# Altium PCB VECTOR_unrouted.PcbDoc
Units mm, origin at the board's own origin, x right, y up, seen from the top; angles counter-clockwise.
Board outline 152.4 x 101.6 mm, 4 copper layers (Top Layer, VCC, Ground, Bottom Layer), stack 0.778 mm thick; 115 components, 252 nets, 1062 pads, 0 vias.
Unrouted connection lines stored in the file: 73.
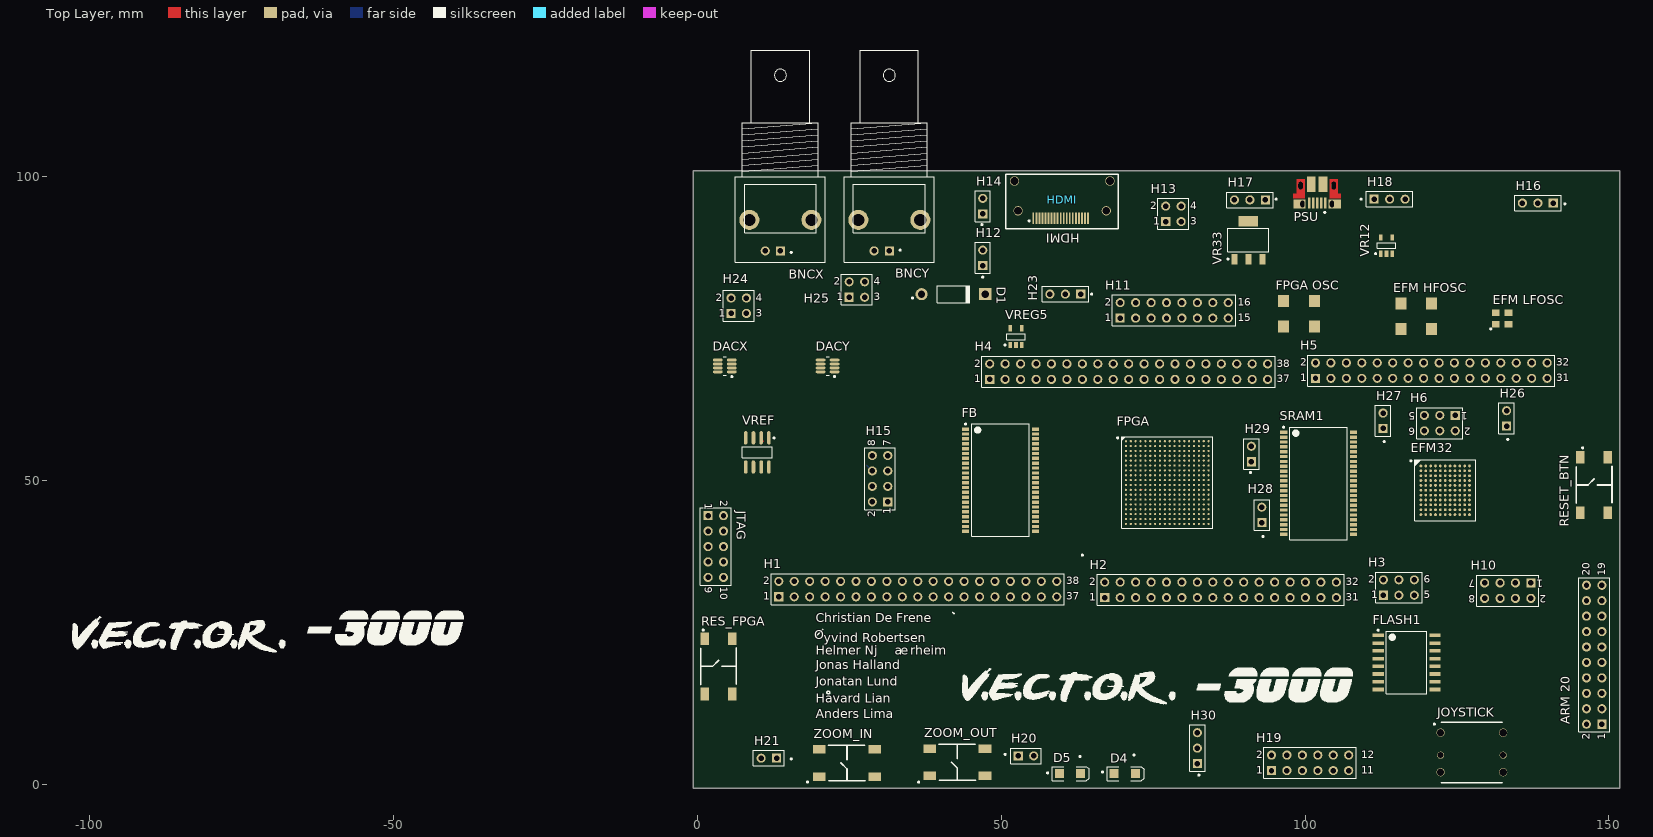
[diagram p0: Top Layer view]
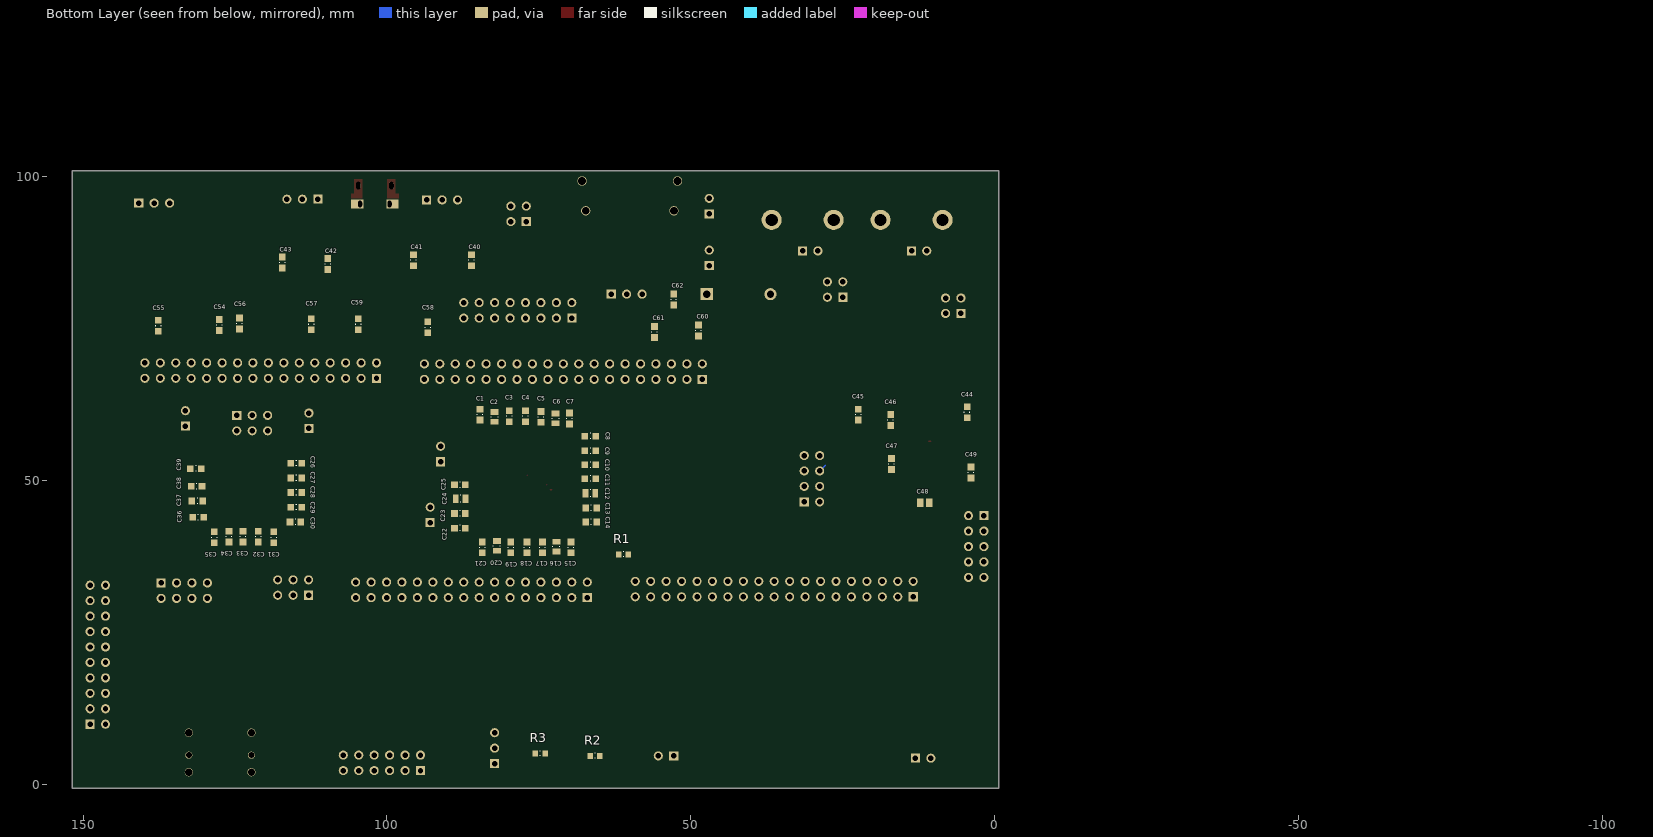
[diagram p1: Bottom Layer view, seen from below]
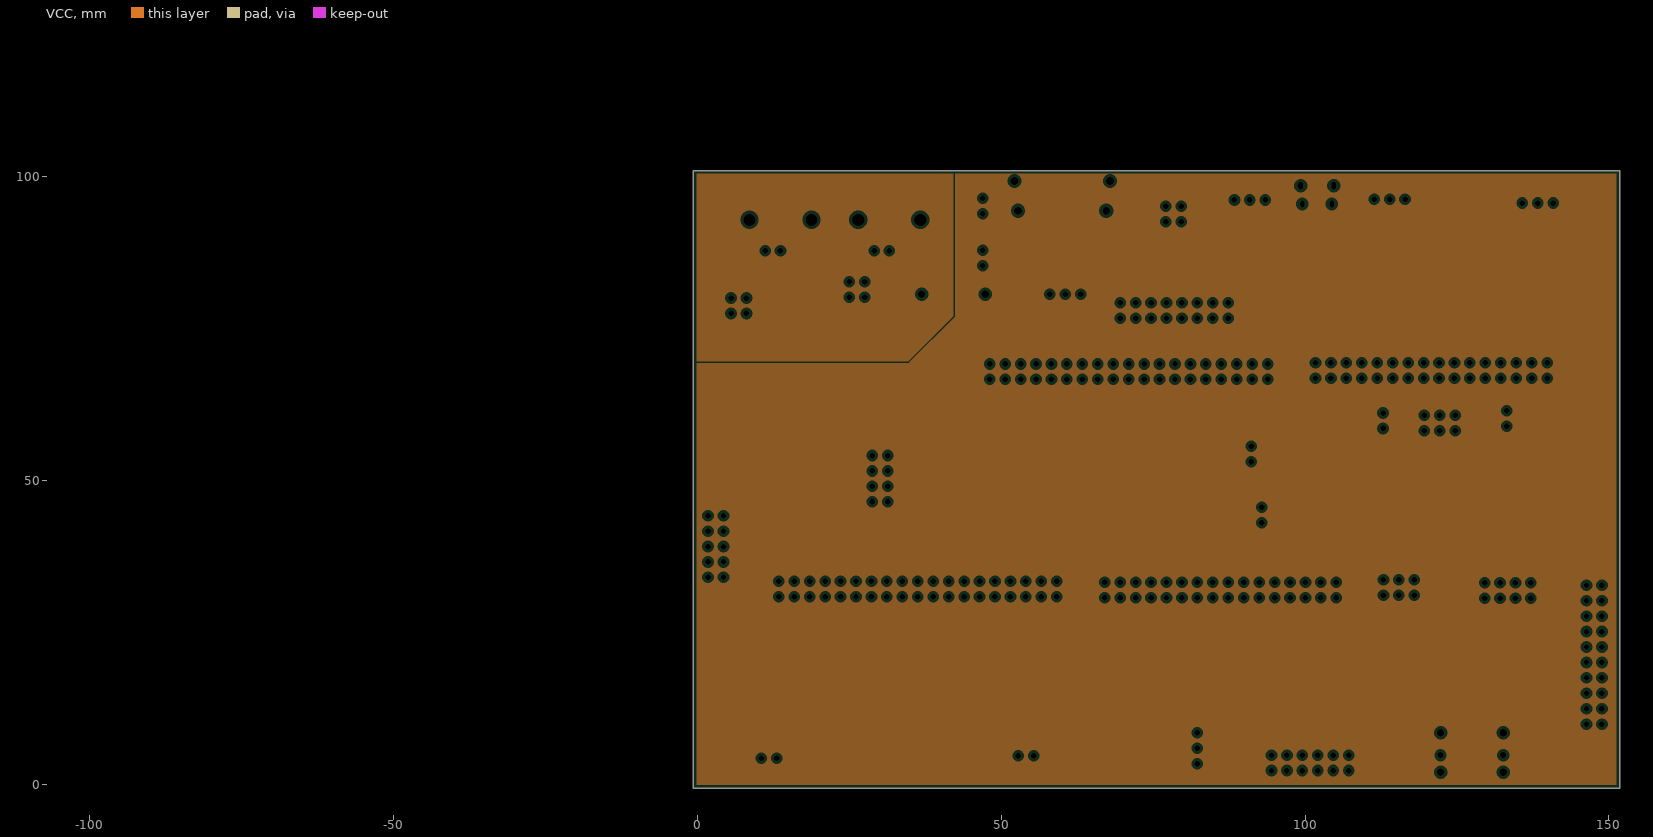
[diagram p2: VCC, clearances drawn from the general rule]
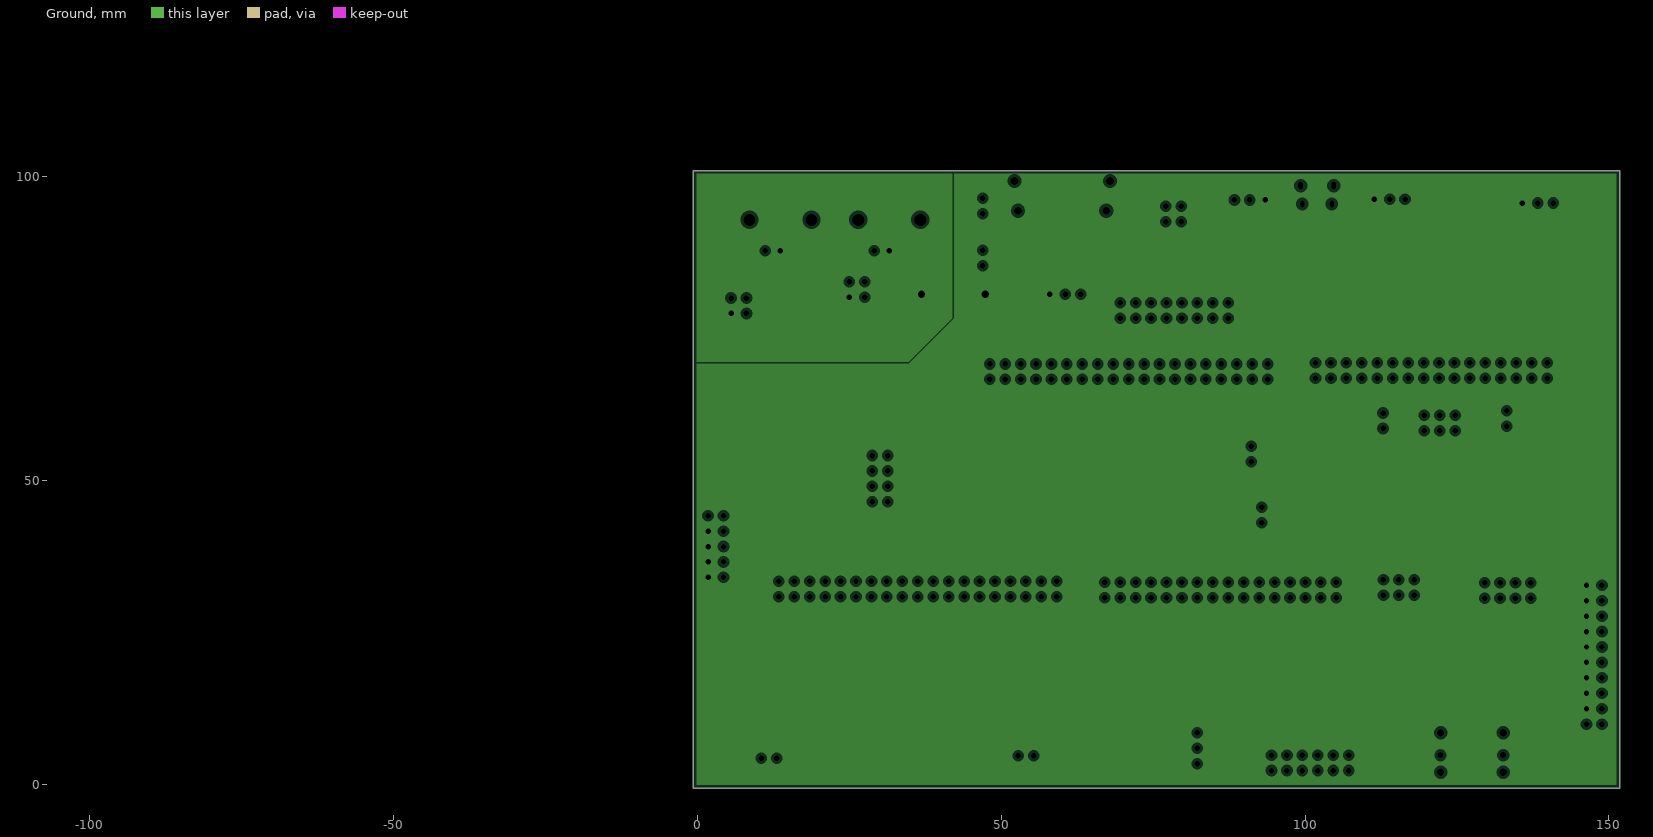
[diagram p3: Ground, clearances drawn from the general rule]

## Layer stack, top to bottom
Top Solder: solder mask 0.0102, Solder Resist, Dk 3.5
Top Layer: signal copper 0.0356
Dielectric 1: core 0.254, FR-4, Dk 4.2
VCC: plane copper 0.036
Dielectric 3: prepreg 0.127, Dk 4.2
Ground: plane copper 0.036, net (Multiple Nets)
Dielectric 2: core 0.254, Dk 4.2
Bottom Layer: signal copper 0.0356
Bottom Solder: solder mask 0.0102, Solder Resist, Dk 3.5

## Board outline
-0.635,-0.635 151.765,-0.635 151.765,100.965 75.692,100.965 -0.635,100.965

## Design rules (kind name [scope] priority, off if disabled: settings)
Clearance Clearance_HDMI [InNetClass('HDMI') vs InNetClass('HDMI')] p1: gap=0.2
Clearance [InNetClass('Non_HDMI') vs InNetClass('Non_HDMI')] p2: gap=0.254
MinimumSolderMaskSliver [All] p1: minsoldermaskwidth=0.1
PlaneClearance [All] p1: clearance=0.508
PlaneConnect [All] p1: planeconnectstyle=Relief reliefexpansion=0.508 reliefentries=4 reliefconductorwidth=0.254 reliefairgap=0.254
PolygonConnect [All] p1: connectstyle=Relief reliefconductorwidth=0.254 reliefentries=4 polygonreliefangle="90 Angle" airgapwidth=0.254
RoutingVias [All] p1: holewidth=0.711 width=1.27 viastyle="Through Hole" minholewidth=0.711 minwidth=1.27 maxholewidth=0.711 maxwidth=1.27
SolderMaskExpansion [All] p1: expansion=0.127
Width Width_Power [InNetClass('Power')] p1: maxlimit=0.508 minlimit=0.508 preferedwidth=0.508
Width Width_Signal [InNetClass('Signal')] p2: maxlimit=0.254 minlimit=0.254 preferedwidth=0.254
Width [All] p3: maxlimit=0.254 minlimit=0.254 preferedwidth=0.254
27 further rules are at their usual default settings.

## Classes and differential pairs
component class SRAM: H4 H5 H6 SRAM1
component class "Power Supply": C40 C41 C42 C43 C60 C61 C62 D4 D5 H16 H17 H18 H23 R2 R3 VR12 VR33 VREG5
component class JoystickButtons: H19 H20 H21 JOYSTICK ZOOM_IN ZOOM_OUT
component class HDMI: H11 H12 H13 H14 HDMI
component class "Frame Buffer": FB H1 H2 H3
component class "FPGA Config": JTAG R1
component class "FPGA Bank 0": FPGA RES_FPGA
component class FPGA_VCC: C1 C2 C3 C4 C5 C6 C7 C8 C9 C10 C11 C12 C13 C14 C15 C16 C17 C18 C19 C20 C21 C22 C23 C24 C25
component class Flash: FLASH1 H10
component class EFM: "ARM 20" C39 EFM32 H29 RESET_BTN
component class "EFM Power": C26 C27 C28 C29 C30 C31 C32 C33 C34 C35 C36 C37 C38
component class DAC: BNCX BNCY C44 C45 C46 C47 C48 C49 D1 DACX DACY H15 H24 H25 H30 VREF
component class Clocks: C54 C55 C56 C57 C58 C59 "EFM HFOSC" "EFM LFOSC" "FPGA OSC" H26 H27 H28
net class EBI.A[0..22]: EBI.A0 EBI.A1 EBI.A2 EBI.A3 EBI.A4 EBI.A5 EBI.A6 EBI.A7 EBI.A8 EBI.A9 EBI.A10 EBI.A11 EBI.A12 EBI.A13 EBI.A14 EBI.A15 EBI.A16 EBI.A17 EBI.A18 EBI.A19 EBI.A20 EBI.A21 EBI.A22
net class EBI.D[0..15]: EBI.D0 EBI.D1 EBI.D2 EBI.D3 EBI.D4 EBI.D5 EBI.D6 EBI.D7 EBI.D8 EBI.D9 EBI.D10 EBI.D11 EBI.D12 EBI.D13 EBI.D14 EBI.D15
net class FB.A[0..18]: FB.A0 FB.A1 FB.A2 FB.A3 FB.A4 FB.A5 FB.A6 FB.A7 FB.A8 FB.A9 FB.A10 FB.A11 FB.A12 FB.A13 FB.A14 FB.A15 FB.A16 FB.A17 FB.A18
net class FB.D[0..15]: FB.D0 FB.D1 FB.D2 FB.D3 FB.D4 FB.D5 FB.D6 FB.D7 FB.D8 FB.D9 FB.D10 FB.D11 FB.D12 FB.D13 FB.D14 FB.D15

## Components (designator, comment, footprint, x,y, rotation, side; value= is the part's Value field where it differs from the comment)
"ARM 20" "ARM 20 Pin Header" HDR2X10 148.844,9.906 r90 top
BNCX "BNC" "BNC_RA CON" 13.716,87.757 r270 top
BNCY "BNC" "BNC_RA CON" 31.623,87.757 r270 top
C1 "4.7uF" CAPC0603(1608)100_M 84.709,60.833 r270 bottom
C2 "100uF" CAPC0805(2012)75_L 82.296,60.452 r270 bottom
C3 "470nF" CAPC0603(1608)100_M 79.883,60.579 r270 bottom
C4 "470nF" CAPC0603(1608)100_M 77.216,60.579 r270 bottom
C5 "4.7uF" CAPC0603(1608)100_M 74.676,60.452 r270 bottom
C6 "100uF" CAPC0805(2012)75_L 72.263,60.198 r90 bottom
C7 "470nF" CAPC0603(1608)100_M 69.977,60.198 r270 bottom
C8 "470nF" CAPC0603(1608)100_M 66.548,57.277 r180 bottom
C9 "470nF" CAPC0603(1608)100_M 66.548,54.864 r180 bottom
C10 "470nF" CAPC0603(1608)100_M 66.548,52.578 r0 bottom
C11 "470nF" CAPC0603(1608)100_M 66.548,50.292 r0 bottom
C12 "100uF" CAPC0805(2012)75_L 66.548,47.879 r0 bottom
C13 "4.7uF" CAPC0603(1608)100_M 66.421,45.466 r0 bottom
C14 "470nF" CAPC0603(1608)100_M 66.421,43.18 r0 bottom
C15 "470nF" CAPC0603(1608)100_M 69.723,38.989 r90 bottom
C16 "100uF" CAPC0805(2012)75_L 72.136,39.116 r90 bottom
C17 "4.7uF" CAPC0603(1608)100_M 74.422,38.989 r90 bottom
C18 "470nF" CAPC0603(1608)100_M 76.962,38.989 r90 bottom
C19 "470nF" CAPC0603(1608)100_M 79.629,38.989 r90 bottom
C20 "100uF" CAPC0805(2012)75_L 81.915,39.243 r90 bottom
C21 "4.7uF" CAPC0603(1608)100_M 84.328,38.989 r90 bottom
C22 "470nF" CAPC0603(1608)100_M 88.011,42.164 r180 bottom
C23 "470nF" CAPC0603(1608)100_M 88.011,44.577 r180 bottom
C24 "100uF" CAPC0805(2012)75_L 87.884,46.99 r180 bottom
C25 "4.7uF" CAPC0603(1608)100_M 88.011,49.276 r180 bottom
C26 "100nF" CAPC0603(1608)100_M 114.935,52.832 r180 bottom
C27 "100nF" CAPC0603(1608)100_M 114.935,50.419 r180 bottom
C28 "100nF" CAPC0603(1608)100_M 114.935,48.006 r180 bottom
C29 "100nF" CAPC0603(1608)100_M 114.935,45.593 r180 bottom
C30 "100nF" CAPC0603(1608)100_M 115.062,43.18 r180 bottom
C31 "100nF" CAPC0603(1608)100_M 118.618,40.64 r270 bottom
C32 "100nF" CAPC0603(1608)100_M 121.158,40.767 r90 bottom
C33 "10uF" CAPC0603(1608)100_M 123.698,40.767 r90 bottom
C34 "100nF" CAPC0603(1608)100_M 125.984,40.767 r90 bottom
C35 "100nF" CAPC0603(1608)100_M 128.397,40.64 r90 bottom
C36 "100nF" CAPC0603(1608)100_M 131.064,43.942 r180 bottom
C37 "1uF" CAPC0603(1608)100_M 131.191,46.609 r180 bottom
C38 "4.7uF" CAPC0603(1608)100_M 131.318,49.022 r180 bottom
C39 "1uF" CAPC0603(1608)100_M 131.445,51.943 r180 bottom
C40 "1uF" CAPC0603(1608)100_M 86.106,86.233 r90 bottom
C41 "1uF" CAPC0603(1608)100_M 95.631,86.233 r90 bottom
C42 "1uF" CAPC0603(1608)100_M 109.728,85.598 r90 bottom
C43 "1uF" CAPC0603(1608)100_M 117.221,85.852 r90 bottom
C44 "1uF" CAPC0603(1608)100_M 4.572,61.214 r90 bottom
C45 "1uF" CAPC0603(1608)100_M 22.479,60.833 r90 bottom
C46 "10uF" CAPC0603(1608)100_M 17.145,59.944 r90 bottom
C47 "100nF" CAPC0603(1608)100_M 17.018,52.705 r90 bottom
C48 "1uF" C0805 11.557,46.355 r0 bottom
C49 "100nF" CAPC0603(1608)100_M 3.937,51.308 r90 bottom
C54 "10nF" CAPC0603(1608)100_M 127.57,75.569 r270 bottom
C55 "15pF" CAPC0603(1608)100_M 137.603,75.442 r270 bottom
C56 "10nF" CAPC0603(1608)100_M 124.268,75.823 r90 bottom
C57 "15pF" CAPC0603(1608)100_M 112.457,75.696 r90 bottom
C58 "10nF" CAPC0603(1608)100_M 93.28,75.188 r90 bottom
C59 "15pF" CAPC0603(1608)100_M 104.71,75.696 r270 bottom
C60 "1uF" CAPC0603(1608)100_M 48.768,74.676 r90 bottom
C61 "4.7uF" CAPC0603(1608)100_M 56.007,74.422 r90 bottom
C62 "4.7uF" CAPC0603(1608)100_M 52.832,79.756 r90 bottom
D1 "Diode 1N4001" DO-41 42.164,80.645 r0 top
D4 "LED2" 3.2X1.6X1.1 70.355,1.77 r0 top
D5 "LED2" 3.2X1.6X1.1 61.345,1.79 r0 top
DACX "AD5061BRJZ-1500RL7" RJ-8_N 4.572,68.834 r180 top
DACY "AD5061BRJZ-1500RL7" RJ-8_N 21.463,68.834 r180 top
EFM32 "EFM32GG990F1024-BGA112" ENMR-BGA112 123.063,48.387 r0 top
"EFM HFOSC" "FXO-HC736R-48" FPGA-OSC 114.87,73.918 r90 top
"EFM LFOSC" "F32K-327" LFOSC-32 131.38,75.696 r90 top
FB "CY7C1051DV33-10ZSXI" TSOP-44-SRAM 49.911,50.038 r0 top
FLASH1 "S25FL129P0XMFI001" SOIC-16-FLASH 116.713,20.066 r0 top
FPGA "XC6SLX45-2CSG324I" CSG324 77.343,49.657 r0 top
"FPGA OSC" "FXO-HC736R-100" FPGA-OSC 95.566,74.299 r90 top
H1 "FB_ADDRESS_HEADER" HDR2X19 13.445,30.865 r0 top
H2 "FB_DATA_HEADER" HDR2X16 67.056,30.734 r0 top
H3 "FB_CONTROL_HEADER" HDR2X3 112.903,31.115 r0 top
H4 "SRAM1_ADDRESS_HEADER" HDR2X19 48.135,66.625 r0 top
H5 "SRAM1_DATA_HEADER" HDR2X16 101.727,66.802 r0 top
H6 "SRAM1_CONTROL_HEADER" HDR2X3 124.714,60.706 r180 top
H10 "FLASH_HEADER" HDR2X4 137.16,33.147 r180 top
H11 "HDMI_HEADER" HDR2X8 69.596,76.708 r0 top
H12 "CEC_HEADER" HDR1X2 46.99,85.344 r90 top
H13 "DDC_HEADER" HDR2X2 77.089,92.583 r0 top
H14 "POWER_HEADER" HDR1X2 46.99,93.853 r90 top
H15 "DAC_HEADER" HDR2X4 31.369,46.482 r90 top
H16 "5V_HEADER" HDR1X3 140.843,95.631 r180 top
H17 "3.3V_HEADER" HDR1X3 93.472,96.139 r180 top
H18 "1.2V_HEADER" HDR1X3 111.379,96.266 r0 top
H19 "JOYSTICK_HEADER" HDR2X6 94.488,2.286 r0 top
H20 "ZOOM_OUT_HEADER" HDR1X2 52.832,4.699 r0 top
H21 "ZOOM_IN_HEADER" HDR1X2 13.081,4.318 r180 top
H23 "5V_DAC_HEADER" HDR1X3 63.119,80.645 r180 top
H24 "Header 2X2" HDR2X2 5.588,77.47 r0 top
H25 "Header 2X2" HDR2X2 25.019,80.137 r0 top
H26 "Header 2" HDR1X2 133.158,58.932 r90 top
H27 "Header 2" HDR1X2 112.838,58.551 r90 top
H28 "Header 2" HDR1X2 92.899,43.057 r90 top
H29 "Header 2" HDR1X2 91.186,53.086 r90 top
H30 "Header 3" HDR1X3 82.296,3.429 r90 top
HDMI "HDMI_connector" HDMI-type-A 67.31,94.361 r180 top
JOYSTICK "SKQUCAA010" 5-WAY-JOYSTICK 122.301,8.509 r0 top
JTAG "Header 5X2" HDR2X5 1.81,44.21 r270 top
PSU "MICRO-USB_CONNECTOR" MICRO-USB 102.005,95.65 r180 top
R1 "4.7kOhm" RESC0603(1608)_N 61.087,37.846 r0 bottom
R2 "39 Ohm" RESC0603(1608)_N 65.786,4.699 r0 bottom
R3 "18 Ohm" RESC0603(1608)_N 74.803,5.08 r0 bottom
RES_FPGA "FSM2JSMA" Button 1.27,14.859 r0 top
RESET_BTN "FSM2JSMA" Button 145.288,44.704 r0 top
SRAM1 "CY7C1051DV33-10ZSXI" TSOP-44-SRAM 102.235,49.53 r0 top
VR12 "ADP170AUJZ-1.2-r7" VREG-1.2 113.411,88.646 r90 top
VR33 "ADP3339AKCZ-3.3-r7" VREG-3.3 90.678,89.535 r90 top
VREF "REF195GSZ-REEL7" ADI-R-8_N 9.906,54.61 r270 top
VREG5 "LP2992AIM5-5.0/NOPB" VREG-5 52.451,73.66 r90 top
ZOOM_IN "FSM2JSMA" Button 29.21,1.27 r90 top
ZOOM_OUT "FSM2JSMA" Button 47.371,1.397 r90 top

## Footprints (in the part's own frame and the unit in brackets; to place one, negate y for a bottom-side part, rotate by r counter-clockwise, add the part's x,y. Pads: shape width x height; smd on the part's side, far side on the other; paste and mask are expansions set on the pad)
3.2X1.6X1.1 [mm] "SMT LED; 2 Flat Leads"
  rect 1.5x1.5 smd: 1(-1.75,0) 2(1.75,0)
  silkscreen extent -2.9,-1.15 3.2,1.15
5-WAY-JOYSTICK [mm]
  oval 1.34x1.35 hole 1.2: 1(0,0) 3(0,-6.5) 4(10.3,-6.5) 6(10.3,0)
  round 1.15 hole 1: 2(0,-3.7) 5(10.3,-3.7)
  silkscreen extent 0.15,-8.25 10.15,1.75
ADI-R-8_N [mm] "SOIC, 8-Leads, Body 4.9x3.9mm, Pitch 1.27mm, IPC Medium Density"
  oval 2.2x0.6 smd: 1(-2.4,1.905) 2(-2.4,0.635) 3(-2.4,-0.635) 4(-2.4,-1.905) 5(2.4,-1.905) 6(2.4,-0.635) 7(2.4,0.635) 8(2.4,1.905)
  silkscreen extent -2.52,-2.5 0.9,2.88, body extent -2,-2.5 2,2.5, height 1.75
"BNC_RA CON" [mm] "Connector; BNC Elbow"
  rect 1.5x1.5 hole 0.9: 1(0,0)
  round 3.3 hole 2: 2(-5.1,5.1) 2(-5.1,-5.1)
  round 1.5 hole 0.9: 2(0,-2.5)
  silkscreen extent -33,-7.4 1.9,7.4
Button [mm] "copied from 256 SoG"
  rect 1.4x2.1 smd: 1(0,9.1) 2(0,0) 3(4.5,9.1) 4(4.5,0)
  silkscreen extent -0.7,1.55 5.21,7.62
C0805 [mm] "Chip Capacitor, Body 2.0x1.3mm, IPC High Density"
  rect 1.1x1.4 smd: 1(-0.75,0) 2(0.75,0)
  body extent -1.1,-0.72 1.1,0.72, height 1.4
CAPC0603(1608)100_M [mm] "Chip Capacitor, Body 1.6x0.8mm, Height 1.0mm, IPC Low Density"
  rect 1.1x1.1 smd: 1(-0.9,0) 2(0.9,0)
  silkscreen extent -0.05,-0.45 0.05,0.45, body extent -0.87,-0.47 0.88,0.48, height 1
CAPC0805(2012)75_L [mm] "Chip Capacitor, Body 2.0x1.2mm, Height 0.75mm, IPC High Density"
  rect 0.95x1.35 smd: 1(-0.8,0) 2(0.8,0)
  silkscreen extent -0.05,-0.58 0.05,0.58, body extent -1.1,-0.72 1.1,0.72, height 0.75
CSG324 [mm] "BGA, 324-Leads, Body 15x15mm, Pitch 0.8mm"
  round 0.36 smd: A1(-6.8,6.8) A2(-6,6.8) A3(-5.2,6.8) A4(-4.4,6.8) A5(-3.6,6.8) A6(-2.8,6.8) A7(-2,6.8) A8(-1.2,6.8) A9(-0.4,6.8) A10(0.4,6.8) A11(1.2,6.8) A12(2,6.8) A13(2.8,6.8) A14(3.6,6.8) A15(4.4,6.8) A16(5.2,6.8) A17(6,6.8) A18(6.8,6.8) B1(-6.8,6) B2(-6,6) B3(-5.2,6) B4(-4.4,6) B5(-3.6,6) B6(-2.8,6) B7(-2,6) B8(-1.2,6) B9(-0.4,6) B10(0.4,6) B11(1.2,6) B12(2,6) B13(2.8,6) B14(3.6,6) B15(4.4,6) B16(5.2,6) B17(6,6) B18(6.8,6) C1(-6.8,5.2) C2(-6,5.2) C3(-5.2,5.2) C4(-4.4,5.2) C5(-3.6,5.2) C6(-2.8,5.2) C7(-2,5.2) C8(-1.2,5.2) C9(-0.4,5.2) C10(0.4,5.2) C11(1.2,5.2) C12(2,5.2) C13(2.8,5.2) C14(3.6,5.2) C15(4.4,5.2) C16(5.2,5.2) C17(6,5.2) C18(6.8,5.2) D1(-6.8,4.4) D2(-6,4.4) D3(-5.2,4.4) D4(-4.4,4.4) D5(-3.6,4.4) D6(-2.8,4.4) D7(-2,4.4) D8(-1.2,4.4) D9(-0.4,4.4) D10(0.4,4.4) D11(1.2,4.4) D12(2,4.4) D13(2.8,4.4) D14(3.6,4.4) D15(4.4,4.4) D16(5.2,4.4) D17(6,4.4) D18(6.8,4.4) E1(-6.8,3.6) E2(-6,3.6) E3(-5.2,3.6) E4(-4.4,3.6) E5(-3.6,3.6) E6(-2.8,3.6) E7(-2,3.6) E8(-1.2,3.6) E9(-0.4,3.6) E10(0.4,3.6) E11(1.2,3.6) E12(2,3.6) E13(2.8,3.6) E14(3.6,3.6) E15(4.4,3.6) E16(5.2,3.6) E17(6,3.6) E18(6.8,3.6) F1(-6.8,2.8) F2(-6,2.8) F3(-5.2,2.8) F4(-4.4,2.8) F5(-3.6,2.8) F6(-2.8,2.8) F7(-2,2.8) F8(-1.2,2.8) F9(-0.4,2.8) F10(0.4,2.8) F11(1.2,2.8) F12(2,2.8) F13(2.8,2.8) F14(3.6,2.8) F15(4.4,2.8) F16(5.2,2.8) F17(6,2.8) F18(6.8,2.8) G1(-6.8,2) G2(-6,2) G3(-5.2,2) G4(-4.4,2) G5(-3.6,2) G6(-2.8,2) G7(-2,2) G8(-1.2,2) G9(-0.4,2) G10(0.4,2) G11(1.2,2) G12(2,2) G13(2.8,2) G14(3.6,2) G15(4.4,2) G16(5.2,2) G17(6,2) G18(6.8,2) H1(-6.8,1.2) H2(-6,1.2) H3(-5.2,1.2) H4(-4.4,1.2) H5(-3.6,1.2) H6(-2.8,1.2) H7(-2,1.2) H8(-1.2,1.2) H9(-0.4,1.2) H10(0.4,1.2) H11(1.2,1.2) H12(2,1.2) H13(2.8,1.2) H14(3.6,1.2) H15(4.4,1.2) H16(5.2,1.2) H17(6,1.2) H18(6.8,1.2) J1(-6.8,0.4) J2(-6,0.4) J3(-5.2,0.4) J4(-4.4,0.4) J5(-3.6,0.4) J6(-2.8,0.4) J7(-2,0.4) J8(-1.2,0.4) J9(-0.4,0.4) J10(0.4,0.4) J11(1.2,0.4) J12(2,0.4) J13(2.8,0.4) J14(3.6,0.4) J15(4.4,0.4) J16(5.2,0.4) J17(6,0.4) J18(6.8,0.4) K1(-6.8,-0.4) K2(-6,-0.4) K3(-5.2,-0.4) K4(-4.4,-0.4) K5(-3.6,-0.4) K6(-2.8,-0.4) K7(-2,-0.4) K8(-1.2,-0.4) K9(-0.4,-0.4) K10(0.4,-0.4) K11(1.2,-0.4) K12(2,-0.4) K13(2.8,-0.4) K14(3.6,-0.4) K15(4.4,-0.4) K16(5.2,-0.4) K17(6,-0.4) K18(6.8,-0.4) L1(-6.8,-1.2) L2(-6,-1.2) L3(-5.2,-1.2) L4(-4.4,-1.2) L5(-3.6,-1.2) L6(-2.8,-1.2) L7(-2,-1.2) L8(-1.2,-1.2) L9(-0.4,-1.2) L10(0.4,-1.2) L11(1.2,-1.2) L12(2,-1.2) L13(2.8,-1.2) L14(3.6,-1.2) L15(4.4,-1.2) L16(5.2,-1.2) L17(6,-1.2) L18(6.8,-1.2) M1(-6.8,-2) M2(-6,-2) M3(-5.2,-2) M4(-4.4,-2) M5(-3.6,-2) M6(-2.8,-2) M7(-2,-2) M8(-1.2,-2) M9(-0.4,-2) M10(0.4,-2) M11(1.2,-2) M12(2,-2) M13(2.8,-2) M14(3.6,-2) M15(4.4,-2) M16(5.2,-2) M17(6,-2) M18(6.8,-2) N1(-6.8,-2.8) N2(-6,-2.8) N3(-5.2,-2.8) N4(-4.4,-2.8) N5(-3.6,-2.8) N6(-2.8,-2.8) N7(-2,-2.8) N8(-1.2,-2.8) N9(-0.4,-2.8) N10(0.4,-2.8) N11(1.2,-2.8) N12(2,-2.8) N13(2.8,-2.8) N14(3.6,-2.8) N15(4.4,-2.8) N16(5.2,-2.8) N17(6,-2.8) N18(6.8,-2.8) P1(-6.8,-3.6) P2(-6,-3.6) P3(-5.2,-3.6) P4(-4.4,-3.6) P5(-3.6,-3.6) P6(-2.8,-3.6) P7(-2,-3.6) P8(-1.2,-3.6) P9(-0.4,-3.6) P10(0.4,-3.6) P11(1.2,-3.6) P12(2,-3.6) P13(2.8,-3.6) P14(3.6,-3.6) P15(4.4,-3.6) P16(5.2,-3.6) P17(6,-3.6) P18(6.8,-3.6) R1(-6.8,-4.4) R2(-6,-4.4) R3(-5.2,-4.4) R4(-4.4,-4.4) R5(-3.6,-4.4) R6(-2.8,-4.4) R7(-2,-4.4) R8(-1.2,-4.4) R9(-0.4,-4.4) R10(0.4,-4.4) R11(1.2,-4.4) R12(2,-4.4) R13(2.8,-4.4) R14(3.6,-4.4) R15(4.4,-4.4) R16(5.2,-4.4) R17(6,-4.4) R18(6.8,-4.4) T1(-6.8,-5.2) T2(-6,-5.2) T3(-5.2,-5.2) T4(-4.4,-5.2) T5(-3.6,-5.2) T6(-2.8,-5.2) T7(-2,-5.2) T8(-1.2,-5.2) T9(-0.4,-5.2) T10(0.4,-5.2) T11(1.2,-5.2) T12(2,-5.2) T13(2.8,-5.2) T14(3.6,-5.2) T15(4.4,-5.2) T16(5.2,-5.2) T17(6,-5.2) T18(6.8,-5.2) U1(-6.8,-6) U2(-6,-6) U3(-5.2,-6) U4(-4.4,-6) U5(-3.6,-6) U6(-2.8,-6) U7(-2,-6) U8(-1.2,-6) U9(-0.4,-6) U10(0.4,-6) U11(1.2,-6) U12(2,-6) U13(2.8,-6) U14(3.6,-6) U15(4.4,-6) U16(5.2,-6) U17(6,-6) U18(6.8,-6) V1(-6.8,-6.8) V2(-6,-6.8) V3(-5.2,-6.8) V4(-4.4,-6.8) V5(-3.6,-6.8) V6(-2.8,-6.8) V7(-2,-6.8) V8(-1.2,-6.8) V9(-0.4,-6.8) V10(0.4,-6.8) V11(1.2,-6.8) V12(2,-6.8) V13(2.8,-6.8) V14(3.6,-6.8) V15(4.4,-6.8) V16(5.2,-6.8) V17(6,-6.8) V18(6.8,-6.8)
  silkscreen extent -8.27,-7.5 7.5,7.5, body extent -7.5,-7.5 7.5,7.5, height 1.5
DO-41 [mm] "Diode, Axial; Body 5.2 x 2.7 mm (LxDia. max), Lead Dia. 0.86 mm (max)"
  round 2 hole 1.2: 1(-5.23,0)
  rect 2x2 hole 1.2: 2(5.23,0)
  silkscreen extent -2.65,-1.4 2.75,1.4
ENMR-BGA112 [mm] "BGA, 112-Balls, Body 10x10mm, Pitch 0.8mm"
  round 0.45 smd: A1(-4,4) A2(-3.2,4) A3(-2.4,4) A4(-1.6,4) A5(-0.8,4) A6(0,4) A7(0.8,4) A8(1.6,4) A9(2.4,4) A10(3.2,4) A11(4,4) B1(-4,3.2) B2(-3.2,3.2) B3(-2.4,3.2) B4(-1.6,3.2) B5(-0.8,3.2) B6(0,3.2) B7(0.8,3.2) B8(1.6,3.2) B9(2.4,3.2) B10(3.2,3.2) B11(4,3.2) C1(-4,2.4) C2(-3.2,2.4) C3(-2.4,2.4) C4(-1.6,2.4) C5(-0.8,2.4) C6(0,2.4) C7(0.8,2.4) C8(1.6,2.4) C9(2.4,2.4) C10(3.2,2.4) C11(4,2.4) D1(-4,1.6) D2(-3.2,1.6) D3(-2.4,1.6) D4(-1.6,1.6) D5(-0.8,1.6) D6(0,1.6) D7(0.8,1.6) D8(1.6,1.6) D9(2.4,1.6) D10(3.2,1.6) D11(4,1.6) E1(-4,0.8) E2(-3.2,0.8) E3(-2.4,0.8) E4(-1.6,0.8) E5(-0.8,0.8) E6(0,0.8) E7(0.8,0.8) E8(1.6,0.8) E9(2.4,0.8) E10(3.2,0.8) E11(4,0.8) F1(-4,0) F2(-3.2,0) F3(-2.4,0) F4(-1.6,0) F5(-0.8,0) F6(0,0) F7(0.8,0) F8(1.6,0) F9(2.4,0) F10(3.2,0) F11(4,0) G1(-4,-0.8) G2(-3.2,-0.8) G3(-2.4,-0.8) G4(-1.6,-0.8) G5(-0.8,-0.8) G6(0,-0.8) G7(0.8,-0.8) G8(1.6,-0.8) G9(2.4,-0.8) G10(3.2,-0.8) G11(4,-0.8) H1(-4,-1.6) H2(-3.2,-1.6) H3(-2.4,-1.6) H4(-1.6,-1.6) H5(-0.8,-1.6) H6(0,-1.6) H7(0.8,-1.6) H8(1.6,-1.6) H9(2.4,-1.6) H10(3.2,-1.6) H11(4,-1.6) J1(-4,-2.4) J2(-3.2,-2.4) J3(-2.4,-2.4) J4(-1.6,-2.4) J5(-0.8,-2.4) J6(0,-2.4) J7(0.8,-2.4) J8(1.6,-2.4) J9(2.4,-2.4) J10(3.2,-2.4) J11(4,-2.4) K1(-4,-3.2) K2(-3.2,-3.2) K3(-2.4,-3.2) K4(-1.6,-3.2) K5(-0.8,-3.2) K6(0,-3.2) K7(0.8,-3.2) K8(1.6,-3.2) K9(2.4,-3.2) K10(3.2,-3.2) K11(4,-3.2) L1(-4,-4) L2(-3.2,-4) L3(-2.4,-4) L4(-1.6,-4) L5(-0.8,-4) L6(0,-4) L7(0.8,-4) L8(1.6,-4) L9(2.4,-4) L10(3.2,-4) L11(4,-4)
  silkscreen extent -5.77,-5 5,5, body extent -5,-5 5,5, height 1.3
FPGA-OSC [mm]
  rect 2x1.8 smd: 1(1.016,-0.889) 2(1.016,-5.969) 3(5.216,-5.969) 4(5.216,-0.889)
  round 0.3 on Top Overlay: 3(-0.381,0.508)
HDMI-type-A [mm]
  rect 0.3x1.9 smd: 1(12,1.2) 2(11.5,1.2) 3(11,1.2) 4(10.5,1.2) 5(10,1.2) 6(9.5,1.2) 7(9,1.2) 8(8.5,1.2) 9(8,1.2) 10(7.5,1.2) 11(7,1.2) 12(6.5,1.2) 13(6,1.2) 14(5.5,1.2) 15(5,1.2) 16(4.5,1.2) 17(4,1.2) 18(3.5,1.2) 19(3,1.2)
  round 1.524 hole 1.3: ""(-0.6,-4.9) ""(0,0) ""(14.5,0) ""(15.1,-4.9)
  silkscreen extent -1.95,-6.01 16.52,2.97
HDR1X2 [mm] "Connector; Header; 2 Position"
  rect 1.5x1.5 hole 0.9: 1(0,0)
  round 1.5 hole 0.9: 2(2.54,0)
  silkscreen extent -1.27,-1.27 3.81,1.27
HDR1X3 [mm] "Connector; Header; 3 Position"
  rect 1.5x1.5 hole 0.9: 1(0,0)
  round 1.5 hole 0.9: 2(2.54,0) 3(5.08,0)
  silkscreen extent -1.27,-1.27 6.35,1.27
HDR2X2 [mm] "Connector; Header; 2x2 Position"
  rect 1.5x1.5 hole 0.9: 1(0,0)
  round 1.5 hole 0.9: 2(0,2.54) 3(2.54,0) 4(2.54,2.54)
  silkscreen extent -1.27,-1.27 3.81,3.81
HDR2X3 [mm] "Connector; Header; 3x2 Position"
  rect 1.5x1.5 hole 0.9: 1(0,0)
  round 1.5 hole 0.9: 2(0,2.54) 3(2.54,0) 4(2.54,2.54) 5(5.08,0) 6(5.08,2.54)
  silkscreen extent -1.27,-1.27 6.35,3.81
HDR2X4 [mm] "Connector; Header; 4x2 Position"
  rect 1.5x1.5 hole 0.9: 1(0,0)
  round 1.5 hole 0.9: 2(0,2.54) 3(2.54,0) 4(2.54,2.54) 5(5.08,0) 6(5.08,2.54) 7(7.62,0) 8(7.62,2.54)
  silkscreen extent -1.27,-1.27 8.89,3.81
HDR2X5 [mm] "Connector; Header; 5x2 Position"
  rect 1.5x1.5 hole 0.9: 1(0,0)
  round 1.5 hole 0.9: 2(0,2.54) 3(2.54,0) 4(2.54,2.54) 5(5.08,0) 6(5.08,2.54) 7(7.62,0) 8(7.62,2.54) 9(10.16,0) 10(10.16,2.54)
  silkscreen extent -1.27,-1.27 11.43,3.81
HDR2X6 [mm] "Connector; Header; 6x2 Position"
  rect 1.5x1.5 hole 0.9: 1(0,0)
  round 1.5 hole 0.9: 2(0,2.54) 3(2.54,0) 4(2.54,2.54) 5(5.08,0) 6(5.08,2.54) 7(7.62,0) 8(7.62,2.54) 9(10.16,0) 10(10.16,2.54) 11(12.7,0) 12(12.7,2.54)
  silkscreen extent -1.27,-1.27 13.97,3.81
HDR2X8 [mm] "Connector; Header; 8x2 Position"
  rect 1.5x1.5 hole 0.9: 1(0,0)
  round 1.5 hole 0.9: 2(0,2.54) 3(2.54,0) 4(2.54,2.54) 5(5.08,0) 6(5.08,2.54) 7(7.62,0) 8(7.62,2.54) 9(10.16,0) 10(10.16,2.54) 11(12.7,0) 12(12.7,2.54) 13(15.24,0) 14(15.24,2.54) 15(17.78,0) 16(17.78,2.54)
  silkscreen extent -1.27,-1.27 19.05,3.81
HDR2X10 [mm] "Connector; Header; 10x2 Position"
  rect 1.5x1.5 hole 0.9: 1(0,0)
  round 1.5 hole 0.9: 2(0,2.54) 3(2.54,0) 4(2.54,2.54) 5(5.08,0) 6(5.08,2.54) 7(7.62,0) 8(7.62,2.54) 9(10.16,0) 10(10.16,2.54) 11(12.7,0) 12(12.7,2.54) 13(15.24,0) 14(15.24,2.54) 15(17.78,0) 16(17.78,2.54) 17(20.32,0) 18(20.32,2.54) 19(22.86,0) 20(22.86,2.54)
  silkscreen extent -1.27,-1.27 24.13,3.81
HDR2X16 [mm] "Connector; Header; 16x2 Position"
  rect 1.5x1.5 hole 0.9: 1(0,0)
  round 1.5 hole 0.9: 2(0,2.54) 3(2.54,0) 4(2.54,2.54) 5(5.08,0) 6(5.08,2.54) 7(7.62,0) 8(7.62,2.54) 9(10.16,0) 10(10.16,2.54) 11(12.7,0) 12(12.7,2.54) 13(15.24,0) 14(15.24,2.54) 15(17.78,0) 16(17.78,2.54) 17(20.32,0) 18(20.32,2.54) 19(22.86,0) 20(22.86,2.54) 21(25.4,0) 22(25.4,2.54) 23(27.94,0) 24(27.94,2.54) 25(30.48,0) 26(30.48,2.54) 27(33.02,0) 28(33.02,2.54) 29(35.56,0) 30(35.56,2.54) 31(38.1,0) 32(38.1,2.54)
  silkscreen extent -1.27,-1.27 39.37,3.81
HDR2X19 [mm] "Connector; Header; 19x2 Position"
  rect 1.5x1.5 hole 0.9: 1(0,0)
  round 1.5 hole 0.9: 2(0,2.54) 3(2.54,0) 4(2.54,2.54) 5(5.08,0) 6(5.08,2.54) 7(7.62,0) 8(7.62,2.54) 9(10.16,0) 10(10.16,2.54) 11(12.7,0) 12(12.7,2.54) 13(15.24,0) 14(15.24,2.54) 15(17.78,0) 16(17.78,2.54) 17(20.32,0) 18(20.32,2.54) 19(22.86,0) 20(22.86,2.54) 21(25.4,0) 22(25.4,2.54) 23(27.94,0) 24(27.94,2.54) 25(30.48,0) 26(30.48,2.54) 27(33.02,0) 28(33.02,2.54) 29(35.56,0) 30(35.56,2.54) 31(38.1,0) 32(38.1,2.54) 33(40.64,0) 34(40.64,2.54) 35(43.18,0) 36(43.18,2.54) 37(45.72,0) 38(45.72,2.54)
  silkscreen extent -1.27,-1.27 46.99,3.81
LFOSC-32 [mm]
  rect 1.1x1.3 smd: 1(0,0) 2(0,-2.1) 3(1.9,-2.1) 4(1.9,0)
MICRO-USB [mm]
  rect 0.4x1.75 smd: 1(-1.3,0) 2(-0.65,0) 3(0,0) 4(0.65,0) 5(1.3,0)
  oval 0.7x1.2 hole 0.7 slot 1.2 at 90 deg unplated: ""(-2.725,-2.855) ""(2.725,-2.855)
  rect 2x1.4 hole 0.65 slot 1.05 at 90 deg unplated copper offset -0.475,0: ""(-2.425,0.175)
  rect 1.425x2.5 smd: ""(-0.963,-3.075) ""(0.962,-3.075)
  rect 2x1.4 hole 0.65 slot 1.05 at 90 deg unplated copper offset 0.475,0: ""(2.425,0.175)
  Top Layer region: -3.9,-1.475 -3.375,-1.475 -3.375,-3.925 -2.075,-3.925 -2.075,-0.775 -3.9,-0.775
  Top Layer region: 3.9,-1.475 3.375,-1.475 3.375,-3.925 2.075,-3.925 2.075,-0.775 3.9,-0.775
RESC0603(1608)_N [mm] "Chip Resistor, Body 1.6x0.8mm, IPC Medium Density"
  rect 0.9x1 smd: 1(-0.8,0) 2(0.8,0)
  silkscreen extent -0.05,-0.4 0.05,0.4, body extent -0.85,-0.47 0.85,0.47, height 0.6
RJ-8_N [mm] "SOP, 8-Leads, Body 2.9x1.6mm, Pitch 0.65mm, IPC Medium Density"
  oval 1.6x0.45 smd: 1(-1.15,0.975) 2(-1.15,0.325) 3(-1.15,-0.325) 4(-1.15,-0.975) 5(1.15,-0.975) 6(1.15,-0.325) 7(1.15,0.325) 8(1.15,0.975)
  silkscreen extent -1.28,-1.5 0.25,1.87, body extent -0.85,-1.5 0.85,1.5, height 1.45
SOIC-16-FLASH [mm] "SOIC, 16-Leads, Body 10.30x7.50mm, Pitch 1.27mm, IPC Medium Density"
  rect 1.85x0.6 smd: 1(-4.675,4.445) 2(-4.675,3.175) 3(-4.675,1.905) 4(-4.675,0.635) 5(-4.675,-0.635) 6(-4.675,-1.905) 7(-4.675,-3.175) 8(-4.675,-4.445) 9(4.675,-4.445) 10(4.675,-3.175) 11(4.675,-1.905) 12(4.675,-0.635) 13(4.675,0.635) 14(4.675,1.905) 15(4.675,3.175) 16(4.675,4.445)
  silkscreen extent -4.8,-5.15 3.35,5.42, body extent -3.75,-5.15 3.75,5.15, height 2.65
TSOP-44-SRAM [mm] "TSOP, 44-Leads, Body 18.41x10.16mm, Pitch 0.80mm, IPC Medium Density"
  rect 1.2x0.55 smd: 1(-5.75,8.4) 2(-5.75,7.6) 3(-5.75,6.8) 4(-5.75,6) 5(-5.75,5.2) 6(-5.75,4.4) 7(-5.75,3.6) 8(-5.75,2.8) 9(-5.75,2) 10(-5.75,1.2) 11(-5.75,0.4) 12(-5.75,-0.4) 13(-5.75,-1.2) 14(-5.75,-2) 15(-5.75,-2.8) 16(-5.75,-3.6) 17(-5.75,-4.4) 18(-5.75,-5.2) 19(-5.75,-6) 20(-5.75,-6.8) 21(-5.75,-7.6) 22(-5.75,-8.4) 23(5.75,-8.4) 24(5.75,-7.6) 25(5.75,-6.8) 26(5.75,-6) 27(5.75,-5.2) 28(5.75,-4.4) 29(5.75,-3.6) 30(5.75,-2.8) 31(5.75,-2) 32(5.75,-1.2) 33(5.75,-0.4) 34(5.75,0.4) 35(5.75,1.2) 36(5.75,2) 37(5.75,2.8) 38(5.75,3.6) 39(5.75,4.4) 40(5.75,5.2) 41(5.75,6) 42(5.75,6.8) 43(5.75,7.6) 44(5.75,8.4)
  silkscreen extent -5.87,-9.25 4.75,9.35, body extent -5.15,-9.25 5.15,9.25, height 1.2
VREG-1.2 [mm] "SOT23, 5-Leads, Body 2.90x2.80mm, Pitch 0.95mm, IPC Medium Density"
  rect 1x0.6 smd: 1(-1.35,0.95) 2(-1.35,0) 3(-1.35,-0.95) 4(1.35,-0.95) 5(1.35,0.95)
  silkscreen extent -1.47,-1.5 0.45,1.92, body extent -0.85,-1.5 0.85,1.5, height 1
VREG-3.3 [mm] "SOT223, 4-Leads, Body 6.50x7.00mm (avg), Pitch 2.30mm, IPC Medium Density"
  rect 1.75x1 smd: 1(-3.125,2.3) 2(-3.125,0) 3(-3.125,-2.3)
  rect 1.75x3.25 smd: 4(3.125,0)
  silkscreen extent -3.25,-3.35 1.95,3.47, body extent -1.85,-3.35 1.85,3.35, height 1.8
VREG-5 [mm] "SOT23, 5-Leads, Body 2.90x2.80mm, Pitch 0.95mm, IPC Medium Density"
  rect 1x0.6 smd: 1(-1.375,0.95) 2(-1.375,0) 3(-1.375,-0.95) 4(1.375,-0.95) 5(1.375,0.95)
  silkscreen extent -1.5,-1.55 0.5,1.92, body extent -0.88,-1.52 0.87,1.53, height 1.45

## Part data
"ARM 20": library part "Header 10X2", "Header, 10-Pin, Dual row"
BNCX BNCY: "BNC Elbow Connector"
C1 C3 C4 C5 C7 C8 C9 C10 C11 C13 C14 C15 C17 C18 C19 C21 C22 C23 C25 C26 C27 C28 C29 C30 C31 C32 C33 C34 C35 C36 C37 C38 C39 C40 C41 C42 C43 C44 C45 C46 C47 C49 C54 C55 C56 C57 C58 C59 C60 C61 C62: library part CMP-1035-00001-1, "CAP 0.5pF 10V ±0.1pF 0603 (1608 Metric) Thickness 1mm SMD"
C2 C6 C12 C16 C20 C24: library part CMP-1036-00001-1, "CAP 0.5pF 10V ±0.1pF 0805 (2012 Metric) Thickness 0.75mm SMD"
C48: library part "Cap Pol3", "Polarized Capacitor (Surface Mount)"
D1: "1 Amp General Purpose Rectifier"
D4 D5: "Typical RED, GREEN, YELLOW, AMBER GaAs LED"
DACX DACY: "Single 16-Bit Voltage Output nanoDAC with SPI Interface, 2.7 to 5.5 V, -40 to +85 degC, RJ-8, Pb-Free, Reel"
EFM32: "EFM32 Giant Gecko, M3 ARM Cortex CPU, 1024 KB Flash, 128 KB RAM, 1.85 - 3.8 V Supply, 48 MHz Max Speed, -40 to 85 degC, 112-Pin BGA, RoHS Compliant"
FPGA: "Spartan-6 LX 1.2V FPGA, 218 User I/Os, 324-Ball Chip-Scale BGA (0.8mm Pitch), Speed Grade 2, Industrial Grade, Pb-Free"
H1 H4: library part "Header 19X2", "Header, 19-Pin, Dual row"
H2 H5: library part "Header 16X2", "Header, 16-Pin, Dual row"
H3 H6: library part "Header 3X2", "Header, 3-Pin, Dual row"
H10 H15: library part "Header 4X2", "Header, 4-Pin, Dual row"
H11: library part "Header 8X2", "Header, 8-Pin, Dual row"
H12 H14 H20 H21: library part "Header 2", "Header, 2-Pin"
H13: library part "Header 2X2", "Header, 2-Pin, Dual row"
H16 H17 H18 H23: library part "Header 3", "Header, 3-Pin"
H19: library part "Header 6X2", "Header, 6-Pin, Dual row"
H24 H25: "Header, 2-Pin, Dual row"
H26 H27 H28 H29: "Header, 2-Pin"
H30: "Header, 3-Pin"
JTAG: "Header, 5-Pin, Dual row"
R1 R2 R3: library part CMP-1012-00001-1, "Jumper 0603 (1608 Metric)"
RES_FPGA RESET_BTN ZOOM_IN ZOOM_OUT: library part switch-button
VREF: "Precision Micropower, Low Dropout Voltage Reference, 5 V Output, 5.1 to 15 V Supply, Industrial, 8-pin SOIC (R-8), Reel"

## Nets (pads, with @x,y where several pads share a name; then routed paths per layer and width w, separated by ;. In a path a pad name is that pad's centre, name@x,y a point inside that pad or via, vN(x,y) a via of type N, cw(c..) or ccw(c..) an arc to the next point about the centre after c; other vN are vias at no path point)
1.2V: C1.2 C2.2 C3.2 C4.2 C43.2 FPGA.G7 FPGA.H9 FPGA.H11 FPGA.J8 FPGA.J10 FPGA.K9 FPGA.K11 FPGA.L8 FPGA.L10 FPGA.M7 FPGA.M12 VR12.5 | length 0
  Top Layer w0.254: FPGA.H9@76.933,50.857 FPGA.H9
3.3V: "ARM 20.1" "EFM HFOSC.4" "EFM LFOSC.4" "FPGA OSC.4" C5.2 C6.2 C7.2 C8.2 C9.2 C10.2 C11.2 C12.2 C13.2 C14.2 C15.2 C16.2 C17.2 C18.2 C19.2 C20.2 C21.2 C22.2 C23.2 C24.2 C25.2 C26.2 C27.2 C28.2 C29.2 C30.2 C31.2 C32.1 C33.1 C34.1 C35.1 C36.1 C41.2 C46.2 C47.2 C54.2 C56.2 C58.2 EFM32.D5 EFM32.D7 EFM32.F8 EFM32.G4 EFM32.G8 EFM32.H7 EFM32.K8 EFM32.K9 EFM32.L4 EFM32.L10 FB.11 FB.33 FLASH1.2 FPGA.B1 FPGA.B5 FPGA.B10 FPGA.B15 FPGA.B17 FPGA.D7 FPGA.D13 FPGA.E2 FPGA.E5 FPGA.E9 FPGA.E10 FPGA.E14 FPGA.E17 FPGA.G4 FPGA.G10 FPGA.G15 FPGA.J2 FPGA.J5 FPGA.J12 FPGA.J14 FPGA.J17 FPGA.K7 FPGA.M4 FPGA.M9 FPGA.M15 FPGA.P5 FPGA.P9 FPGA.P10 FPGA.P14 FPGA.R2 FPGA.R6 FPGA.R12 FPGA.R17 FPGA.U4 FPGA.U9 FPGA.U14 H20.1 H21.2 R1.2 R3.2 SRAM1.11 SRAM1.33 VR33.2 VREF.2 ZOOM_IN.1 ZOOM_IN.3 ZOOM_OUT.1 ZOOM_OUT.3 | length 0.4
  Top Layer w0.254: VREF.2@10.541,56.413 10.922,56.413
5V: H16.1 PSU.1
A5V: C44.1 C45.1 C62.2 DACX.2 DACY.2 R2.2 VREG5.5
AGND: BNCX.1 BNCY.1 C60.1 C61.1 C62.1 D1.1 D4.2 DACX.5 DACY.5 H24.1 H25.1 H29.2 VREG5.2
CLK: DACX.8 DACY.8 H15.6 | length 1.3
  Bottom Layer w0.254: 27.889,52.502 H15.6
DATA_X: DACX.1 H15.2
DATA_Y: DACY.1 H15.4
EBI.A0: EFM32.J4 FPGA.F15 H4.1
EBI.A1: EFM32.K3 FPGA.F16 H4.3
EBI.A2: EFM32.L3 FPGA.C17 H4.5
EBI.A3: EFM32.J7 FPGA.C18 H4.7
EBI.A4: EFM32.J8 FPGA.F14 H4.9
EBI.A5: EFM32.G10 FPGA.G14 H4.11
EBI.A6: EFM32.G11 FPGA.D17 H4.13
EBI.A7: EFM32.E9 FPGA.D18 H4.15
EBI.A8: EFM32.E10 FPGA.H12 H4.17
EBI.A9: EFM32.F10 FPGA.G13 H4.19
EBI.A10: EFM32.E11 FPGA.E16 H4.21
EBI.A11: EFM32.A9 FPGA.E18 H4.23
EBI.A12: EFM32.B9 FPGA.K12 H4.25
EBI.A13: EFM32.C9 FPGA.K13 H4.27
EBI.A14: EFM32.D9 FPGA.F17 H4.29
EBI.A15: EFM32.D10 FPGA.F18 H4.31
EBI.A16: EFM32.E4 FPGA.H13 H4.33
EBI.A17: EFM32.F1 FPGA.H14 H4.35
EBI.A18: EFM32.F2 FPGA.H15 H4.37
EBI.A19: EFM32.F3 FPGA.H16
EBI.A20: EFM32.F4 FPGA.G16
EBI.A21: EFM32.G1 FPGA.G18
EBI.A22: EFM32.G2 FPGA.J13
EBI.CS0: EFM32.D6
EBI.CS1: EFM32.A5 FPGA.N18 H6.6
EBI.D0: EFM32.B4 FPGA.K14 H5.2 | length 0.1
  Top Layer w0.254: H5.2 H5.2@101.797,69.342
EBI.D1: EFM32.A4 FPGA.L12 H5.4
EBI.D2: EFM32.C3 FPGA.L13 H5.6
EBI.D3: EFM32.B3 FPGA.K15 H5.8
EBI.D4: EFM32.A3 FPGA.K16 H5.10
EBI.D5: EFM32.B2 FPGA.L15 H5.12
EBI.D6: EFM32.A2 FPGA.L16 H5.14
EBI.D7: EFM32.A1 FPGA.H17 H5.16
EBI.D8: EFM32.B1 FPGA.H18 H5.18
EBI.D9: EFM32.C2 FPGA.J16 H5.20
EBI.D10: EFM32.C1 FPGA.J18 H5.22
EBI.D11: EFM32.D2 FPGA.K17 H5.24
EBI.D12: EFM32.D1 FPGA.K18 H5.26
EBI.D13: EFM32.E3 FPGA.L17 H5.28
EBI.D14: EFM32.E2 FPGA.L18 H5.30
EBI.D15: EFM32.E1 FPGA.M16 H5.32
EBI.REN: EFM32.A7 FPGA.N17 H6.4
EBI.WEN: EFM32.B6 FPGA.M18 H6.2
FB.A0: FPGA.N4 H1.1
FB.A1: FPGA.N3 H1.3
FB.A2: FPGA.P4 H1.5
FB.A3: FPGA.P3 H1.7
FB.A4: FPGA.L6 H1.9
FB.A5: FPGA.M5 H1.11
FB.A6: FPGA.U2 H1.13
FB.A7: FPGA.U1 H1.15
FB.A8: FPGA.T2 H1.17
FB.A9: FPGA.T1 H1.19
FB.A10: FPGA.P2 H1.21
FB.A11: FPGA.P1 H1.23
FB.A12: FPGA.N2 H1.25
FB.A13: FPGA.N1 H1.27
FB.A14: FPGA.M3 H1.29
FB.A15: FPGA.M1 H1.31
FB.A16: FPGA.L2 H1.33
FB.A17: FPGA.L1 H1.35
FB.A18: FPGA.K2 H1.37
FB.CS: FPGA.J6 H3.6
FB.D0: FPGA.K1 H2.2
FB.D1: FPGA.L4 H2.4 | length 0.2
  Top Layer w0.254: FPGA.L4 73.168,48.457
FB.D2: FPGA.L3 H2.6
FB.D3: FPGA.J3 H2.8
FB.D4: FPGA.J1 H2.10
FB.D5: FPGA.H2 H2.12
FB.D6: FPGA.H1 H2.14
FB.D7: FPGA.K4 H2.16
FB.D8: FPGA.K3 H2.18
FB.D9: FPGA.L5 H2.20
FB.D10: FPGA.K5 H2.22 | length 0
  Top Layer w0.254: FPGA.K5 FPGA.K5@73.752,49.257
FB.D11: FPGA.H4 H2.24
FB.D12: FPGA.H3 H2.26
FB.D13: FPGA.L7 H2.28
FB.D14: FPGA.K6 H2.30
FB.D15: FPGA.G3 H2.32
FB.REN: FPGA.J7 H3.4
FB.WEN: FPGA.G1 H3.2
FPGAB.CLK+: FPGA.B2 H11.13
FPGAB.CLK-: FPGA.A2 H11.15
FPGAB.D0+: FPGA.B6 H11.9
FPGAB.D0-: FPGA.A6 H11.11
FPGAB.D1+: FPGA.B4 H11.5
FPGAB.D1-: FPGA.A4 H11.7
FPGAB.D2+: FPGA.B3 H11.1
FPGAB.D2-: FPGA.A3 H11.3
GND: "ARM 20.4" "ARM 20.6" "ARM 20.8" "ARM 20.10" "ARM 20.12" "ARM 20.14" "ARM 20.16" "ARM 20.18" "ARM 20.20" "EFM HFOSC.2" "EFM LFOSC.2" "FPGA OSC.2" C1.1 C2.1 C3.1 C4.1 C5.1 C6.1 C7.1 C8.1 C9.1 C10.1 C11.1 C12.1 C13.1 C14.1 C15.1 C16.1 C17.1 C18.1 C19.1 C20.1 C21.1 C22.1 C23.1 C24.1 C25.1 C26.1 C27.1 C28.1 C29.1 C30.1 C31.1 C32.2 C33.2 C34.2 C35.2 C36.2 C37.2 C38.1 C39.2 C40.1 C41.1 C42.1 C43.1 C44.2 C45.2 C46.1 C47.1 C48.2 C49.1 C54.1 C55.1 C56.1 C57.1 C58.1 C59.1 D1.2 D5.2 DACX.6 DACY.6 EFM32.C7 EFM32.D4 EFM32.F9 EFM32.G3 EFM32.G9 EFM32.H6 EFM32.K4 EFM32.K7 EFM32.K10 EFM32.L7 FB.12 FB.34 FB.39 FB.40 FLASH1.10 FPGA.A1 FPGA.A18 FPGA.B7 FPGA.B13 FPGA.C3 FPGA.C16 FPGA.D5 FPGA.D10 FPGA.E15 FPGA.G2 FPGA.G5 FPGA.G12 FPGA.G17 FPGA.H8 FPGA.H10 FPGA.J4 FPGA.J9 FPGA.J11 FPGA.J15 FPGA.K8 FPGA.K10 FPGA.L9 FPGA.L11 FPGA.M2 FPGA.M6 FPGA.M17 FPGA.N13 FPGA.P13 FPGA.R1 FPGA.R4 FPGA.R9 FPGA.R14 FPGA.R16 FPGA.R18 FPGA.T16 FPGA.U6 FPGA.U12 FPGA.V1 FPGA.V18 H16.3 H17.1 H18.1 H23.3 HDMI.2 HDMI.5 HDMI.8 HDMI.11 HDMI.14 HDMI.17 JTAG.3 JTAG.5 JTAG.7 JTAG.9 PSU.5 RES_FPGA.2 RES_FPGA.4 RESET_BTN.1 RESET_BTN.3 SRAM1.12 SRAM1.34 SRAM1.39 SRAM1.40 VR12.2 VR33.1 VREF.4 ZOOM_IN.2 ZOOM_IN.4 ZOOM_OUT.2 ZOOM_OUT.4
HDMI.5V: H14.2 HDMI.18
HDMI.CEC: H12.1 HDMI.13
HDMI.CLK+: H11.14 HDMI.10
HDMI.CLK-: H11.16 HDMI.12
HDMI.D0+: H11.10 HDMI.7
HDMI.D0-: H11.12 HDMI.9
HDMI.D1+: H11.6 HDMI.4
HDMI.D1-: H11.8 HDMI.6
HDMI.D2+: H11.2 HDMI.1
HDMI.D2-: H11.4 HDMI.3
HDMI.DDC_CLK: H13.2 HDMI.15
HDMI.DDC_DATA: H13.4 HDMI.16
"NetARM 20_7": "ARM 20.7" EFM32.E8
"NetARM 20_9": "ARM 20.9" EFM32.D8
"NetARM 20_13": "ARM 20.13" EFM32.C8
"NetARM 20_15": "ARM 20.15" EFM32.K6 RESET_BTN.2 RESET_BTN.4
NetBNCX_2: BNCX.2 H24.4
NetBNCY_2: BNCY.2 H25.4
NetC37_1: C37.1 EFM32.B11
NetC38_2: C38.2 EFM32.B8 EFM32.B10
NetC39_1: C39.1 EFM32.F11
NetC40_2: C40.2 H17.2 VR33.3
NetC42_2: C42.2 H18.2 VR12.1 VR12.3
NetC48_1: C48.1 C49.2 H30.3 VREF.6
NetC55_2: "EFM LFOSC.3" C55.2 H26.1
NetC57_2: "EFM HFOSC.3"@120.839,79.134 C57.2 H27.1
NetC59_2: "FPGA OSC.3"@101.535,79.515 C59.2 H28.1
NetC60_2: C60.2 H23.2 VREG5.1 VREG5.3
NetC61_2: C61.2 VREG5.4
NetD4_1: D4.1 R2.1
NetD5_1: D5.1 R3.1
NetDACX_3: DACX.3 DACY.3 H30.2
NetDACX_4: DACX.4 H24.3
NetDACY_4: DACY.4 H25.3
NetEFM32_C11: EFM32.C11 H30.1
NetEFM32_H8: EFM32.H8 H19.12
NetEFM32_H9: EFM32.H9 H19.6
NetEFM32_H10: EFM32.H10 H19.8
NetEFM32_H11: EFM32.H11 H19.10
NetEFM32_J2: EFM32.J2 JTAG.1
NetEFM32_J3: EFM32.J3 H29.1
NetEFM32_J9: EFM32.J9 H21.1
NetEFM32_J10: EFM32.J10 H19.2
NetEFM32_J11: EFM32.J11 H19.4
NetEFM32_K11: EFM32.K11 H20.2
NetEFM32_L1: EFM32.L1 H26.2
NetEFM32_L5: EFM32.L5 H24.2
NetEFM32_L6: EFM32.L6 H25.2
NetEFM32_L9: EFM32.L9 H27.2
NetEFM32_L11: EFM32.L11 H10.1
NetFB_1: FB.1 H1.2
NetFB_2: FB.2 H1.4
NetFB_3: FB.3 H1.6
NetFB_4: FB.4 H1.8
NetFB_5: FB.5 H1.10
NetFB_6: FB.18 H1.12
NetFB_7: FB.19 H1.14
NetFB_8: FB.20 H1.16
NetFB_9: FB.21 H1.18
NetFB_10: FB.22 H1.20
NetFB_11: FB.23 H1.22
NetFB_12: FB.24 H1.24
NetFB_13: FB.25 H1.26
NetFB_14: FB.26 H1.28
NetFB_15: FB.27 H1.30
NetFB_16: FB.42 H1.32
NetFB_17: FB.43 H1.34
NetFB_18: FB.44 H1.36
NetFB_19: FB.28 H1.38
NetFB_24: FB.7 H2.1
NetFB_25: FB.8 H2.3
NetFB_26: FB.9 H2.5
NetFB_27: FB.10 H2.7
NetFB_28: FB.13 H2.9
NetFB_29: FB.14 H2.11
NetFB_30: FB.15 H2.13
NetFB_31: FB.16 H2.15
NetFB_32: FB.29 H2.17
NetFB_33: FB.30 H2.19
NetFB_34: FB.31 H2.21
NetFB_35: FB.32 H2.23
NetFB_36: FB.35 H2.25
NetFB_37: FB.36 H2.27
NetFB_38: FB.37 H2.29
NetFB_39: FB.38 H2.31
NetFB_40: FB.17 H3.1
NetFB_41: FB.41 H3.3
NetFB_44: FB.6 H3.5
NetFLASH1_1: FLASH1.15 H10.2
NetFLASH1_2: FLASH1.8 H10.4
NetFLASH1_5: FLASH1.7 H10.6
NetFLASH1_6: FLASH1.16 H10.8
NetFPGA_A8: FPGA.A8 VREF.3
NetFPGA_A10: FPGA.A10 H10.5
NetFPGA_A11: FPGA.A11 H15.5
NetFPGA_A12: FPGA.A12 H15.7
NetFPGA_A16: FPGA.A16 RES_FPGA.1 RES_FPGA.3
NetFPGA_A17: FPGA.A17 JTAG.4
NetFPGA_B11: FPGA.B11 H15.1
NetFPGA_B12: FPGA.B12 H15.3
NetFPGA_B18: FPGA.B18 JTAG.10
NetFPGA_C9: FPGA.C9 H10.3
NetFPGA_C10: FPGA.C10 H10.7
NetFPGA_D15: FPGA.D15 JTAG.6
NetFPGA_D16: FPGA.D16 JTAG.8
NetFPGA_T10: FPGA.T10 H28.2
NetFPGA_V2: FPGA.V2 R1.1
NetFPGA_V17: FPGA.V17 JTAG.2
NetH4_2: H4.2 SRAM1.1
NetH4_4: H4.4 SRAM1.2
NetH4_6: H4.6 SRAM1.3
NetH4_8: H4.8 SRAM1.4
NetH4_10: H4.10 SRAM1.5
NetH4_12: H4.12 SRAM1.18
NetH4_14: H4.14 SRAM1.19
NetH4_16: H4.16 SRAM1.20
NetH4_18: H4.18 SRAM1.21
NetH4_20: H4.20 SRAM1.22
NetH4_22: H4.22 SRAM1.23
NetH4_24: H4.24 SRAM1.24
NetH4_26: H4.26 SRAM1.25
NetH4_28: H4.28 SRAM1.26
NetH4_30: H4.30 SRAM1.27
NetH4_32: H4.32 SRAM1.42
NetH4_34: H4.34 SRAM1.43
NetH4_36: H4.36 SRAM1.44
NetH4_38: H4.38 SRAM1.28
NetH5_1: H5.1 SRAM1.7
NetH5_3: H5.3 SRAM1.8
NetH5_5: H5.5 SRAM1.9
NetH5_7: H5.7 SRAM1.10
NetH5_9: H5.9 SRAM1.13
NetH5_11: H5.11 SRAM1.14
NetH5_13: H5.13 SRAM1.15
NetH5_15: H5.15 SRAM1.16
NetH5_17: H5.17 SRAM1.29
NetH5_19: H5.19 SRAM1.30
NetH5_21: H5.21 SRAM1.31
NetH5_23: H5.23 SRAM1.32
NetH5_25: H5.25 SRAM1.35
NetH5_27: H5.27 SRAM1.36
NetH5_29: H5.29 SRAM1.37
NetH5_31: H5.31 SRAM1.38
NetH6_1: H6.1 SRAM1.17
NetH6_3: H6.3 SRAM1.41
NetH6_5: H6.5 SRAM1.6
NetH14_1: H14.1 H16.2 H17.3 H18.3 H23.1
NetH19_1: H19.1 JOYSTICK.3
NetH19_3: H19.3 JOYSTICK.2
NetH19_5: H19.5 JOYSTICK.1
NetH19_7: H19.7 JOYSTICK.6
NetH19_9: H19.9 JOYSTICK.5
NetH19_11: H19.11 JOYSTICK.4
SYNC: DACX.7 DACY.7 H15.8
pads on no net: "ARM 20.2" "ARM 20.3" "ARM 20.5" "ARM 20.11" "ARM 20.17" "ARM 20.19" "EFM HFOSC.1" "EFM HFOSC.3"@114.362,73.537 "EFM LFOSC.1" "FPGA OSC.1" "FPGA OSC.3"@95.058,73.918 EFM32.A6 EFM32.A8 EFM32.A10 EFM32.A11 EFM32.B5 EFM32.B7 EFM32.C4 EFM32.C5 EFM32.C6 EFM32.C10 EFM32.D3 EFM32.D11 EFM32.E5 EFM32.E6 EFM32.E7 EFM32.F5 EFM32.F6 EFM32.F7 EFM32.G5 EFM32.G6 EFM32.G7 EFM32.H1 EFM32.H2 EFM32.H3 EFM32.H4 EFM32.H5 EFM32.J1 EFM32.J5 EFM32.J6 EFM32.K1 EFM32.K2 EFM32.K5 EFM32.L2 EFM32.L8 FLASH1.1 FLASH1.3 FLASH1.4 FLASH1.5 FLASH1.6 FLASH1.9 FLASH1.11 FLASH1.12 FLASH1.13 FLASH1.14 FPGA.A5 FPGA.A7 FPGA.A9 FPGA.A13 FPGA.A14 FPGA.A15 FPGA.B8 FPGA.B9 FPGA.B14 FPGA.B16 FPGA.C1 FPGA.C2 FPGA.C4 FPGA.C5 FPGA.C6 FPGA.C7 FPGA.C8 FPGA.C11 FPGA.C12 FPGA.C13 FPGA.C14 FPGA.C15 FPGA.D1 FPGA.D2 FPGA.D3 FPGA.D4 FPGA.D6 FPGA.D8 FPGA.D9 FPGA.D11 FPGA.D12 FPGA.D14 FPGA.E1 FPGA.E3 FPGA.E4 FPGA.E6 FPGA.E7 FPGA.E8 FPGA.E11 FPGA.E12 FPGA.E13 FPGA.F1 FPGA.F2 FPGA.F3 FPGA.F4 FPGA.F5 FPGA.F6 FPGA.F7 FPGA.F8 FPGA.F9 FPGA.F10 FPGA.F11 FPGA.F12 FPGA.F13 FPGA.G6 FPGA.G8 FPGA.G9 FPGA.G11 FPGA.H5 FPGA.H6 FPGA.H7 FPGA.L14 FPGA.M8 FPGA.M10 FPGA.M11 FPGA.M13 FPGA.M14 FPGA.N5 FPGA.N6 FPGA.N7 FPGA.N8 FPGA.N9 FPGA.N10 FPGA.N11 FPGA.N12 FPGA.N14 FPGA.N15 FPGA.N16 FPGA.P6 FPGA.P7 FPGA.P8 FPGA.P11 FPGA.P12 FPGA.P15 FPGA.P16 FPGA.P17 FPGA.P18 FPGA.R3 FPGA.R5 FPGA.R7 FPGA.R8 FPGA.R10 FPGA.R11 FPGA.R13 FPGA.R15 FPGA.T3 FPGA.T4 FPGA.T5 FPGA.T6 FPGA.T7 FPGA.T8 FPGA.T9 FPGA.T11 FPGA.T12 FPGA.T13 FPGA.T14 FPGA.T15 FPGA.T17 FPGA.T18 FPGA.U3 FPGA.U5 FPGA.U7 FPGA.U8 FPGA.U10 FPGA.U11 FPGA.U13 FPGA.U15 FPGA.U16 FPGA.U17 FPGA.U18 FPGA.V3 FPGA.V4 FPGA.V5 FPGA.V6 FPGA.V7 FPGA.V8 FPGA.V9 FPGA.V10 FPGA.V11 FPGA.V12 FPGA.V13 FPGA.V14 FPGA.V15 FPGA.V16 H12.2 H13.1 H13.3 HDMI. HDMI.19 PSU. PSU.2 PSU.3 PSU.4 VR12.4 VR33.4 VREF.1 VREF.5 VREF.7 VREF.8

## Polygon pours and split planes (outlines as drawn)
no net on VCC (split plane): 42.162,77.016 34.744,69.598 -0.125,69.598 -0.125,100.455 42.162,100.455
no net on VCC (split plane): 151.255,-0.125 -0.125,-0.125 -0.125,69.34 34.798,69.34 34.848,69.349 34.89,69.377 42.383,76.87 42.411,76.912 42.42,76.962 42.42,100.455 151.255,100.455
AGND on Ground (split plane): 42.035,100.276 42.035,76.762 34.744,69.471 -0.125,69.471 -0.125,100.455 41.856,100.455
GND on Ground (split plane): 151.255,-0.125 -0.125,-0.125 -0.125,69.213 34.798,69.213 34.848,69.222 34.89,69.25 42.256,76.616 42.284,76.658 42.293,76.708 42.293,100.33 42.284,100.38 42.256,100.422 42.223,100.455 151.255,100.455

## Other copper
Ground (plane layer: these items are gaps in the copper):
  lines w0.254: -0.889,69.342 34.798,69.342 42.164,76.708 42.164,100.33 41.529,100.965 -0.381,100.965 -0.635,100.711
VCC (plane layer: these items are gaps in the copper):
  lines w0.254: -0.635,69.469 34.798,69.469 42.291,76.962 42.291,100.965 -0.635,100.965

## Silkscreen, mask and mechanical layers (free items; w line width, h text height)
Top Overlay:
  drawing of 3078 lines, arcs and shapes, not listed
  text "Christian De Frene" at 19.558,26.67 h1.52
  text "O" at 19.304,23.876 h1.52
  text "yvind Robertsen" at 20.828,23.368 h1.52
  text "Helmer Nj" at 19.558,21.336 h1.52
  text "a" at 32.512,21.336 h1.52
  text "e" at 33.528,21.336 h1.52
  text "rheim" at 35.052,21.336 h1.52
  text "Jonas Halland" at 19.558,18.923 h1.52
  text "Jonatan Lund" at 19.558,16.256 h1.52
  text "Havard Lian" at 19.558,13.462 h1.52
  text "Anders Lima" at 19.558,10.922 h1.52

## Text inside footprints (layer, text, board x,y; h text height)
"ARM 20": Top Overlay "20" at 146.812,34.29 h1.27 r90; Top Overlay "19" at 149.352,34.29 h1.27 r90; Top Overlay "1" at 149.352,7.366 h1.27 r90; Top Overlay "2" at 146.812,7.366 h1.27 r90
H1: Top Overlay "2" at 10.905,32.897 h1.27; Top Overlay "1" at 10.905,30.357 h1.27; Top Overlay "37" at 60.689,30.357 h1.27; Top Overlay "38" at 60.689,32.897 h1.27
H2: Top Overlay "2" at 64.516,32.766 h1.27; Top Overlay "1" at 64.516,30.226 h1.27; Top Overlay "31" at 106.68,30.226 h1.27; Top Overlay "32" at 106.68,32.766 h1.27
H3: Top Overlay "6" at 119.507,33.147 h1.27; Top Overlay "5" at 119.507,30.607 h1.27; Top Overlay "2" at 110.363,33.147 h1.27; Top Overlay "1" at 110.871,30.607 h1.27
H4: Top Overlay "2" at 45.595,68.657 h1.27; Top Overlay "1" at 45.595,66.117 h1.27; Top Overlay "37" at 95.379,66.117 h1.27; Top Overlay "38" at 95.379,68.657 h1.27
H5: Top Overlay "2" at 99.187,68.834 h1.27; Top Overlay "1" at 99.187,66.294 h1.27; Top Overlay "31" at 141.351,66.294 h1.27; Top Overlay "32" at 141.351,68.834 h1.27
H6: Top Overlay "6" at 118.11,58.674 h1.27 r180; Top Overlay "5" at 118.11,61.214 h1.27 r180; Top Overlay "2" at 127.254,58.674 h1.27 r180; Top Overlay "1" at 126.746,61.214 h1.27 r180
H10: Top Overlay "2" at 139.7,31.115 h1.27 r180; Top Overlay "1" at 139.192,33.655 h1.27 r180; Top Overlay "7" at 128.016,33.655 h1.27 r180; Top Overlay "8" at 128.016,31.115 h1.27 r180
H11: Top Overlay "2" at 67.056,78.74 h1.27; Top Overlay "1" at 67.056,76.2 h1.27; Top Overlay "15" at 88.9,76.2 h1.27; Top Overlay "16" at 88.9,78.74 h1.27
H13: Top Overlay "1" at 75.057,92.075 h1.27; Top Overlay "2" at 74.549,94.615 h1.27; Top Overlay "4" at 81.153,94.615 h1.27; Top Overlay "3" at 81.153,92.075 h1.27
H15: Top Overlay "2" at 29.337,43.942 h1.27 r90; Top Overlay "1" at 31.877,44.45 h1.27 r90; Top Overlay "7" at 31.877,55.626 h1.27 r90; Top Overlay "8" at 29.337,55.626 h1.27 r90
H19: Top Overlay "12" at 109.22,4.318 h1.27; Top Overlay "1" at 110.236,1.778 h1.27; Top Overlay "1" at 109.22,1.778 h1.27; Top Overlay "1" at 91.948,1.778 h1.27; Top Overlay "2" at 91.948,4.318 h1.27
H24: Top Overlay "3" at 9.652,76.962 h1.27; Top Overlay "4" at 9.652,79.502 h1.27; Top Overlay "2" at 3.048,79.502 h1.27; Top Overlay "1" at 3.556,76.962 h1.27
H25: Top Overlay "3" at 29.083,79.629 h1.27; Top Overlay "4" at 29.083,82.169 h1.27; Top Overlay "2" at 22.479,82.169 h1.27; Top Overlay "1" at 22.987,79.629 h1.27
JTAG: Top Overlay "10" at 3.842,32.526 h1.27 r270; Top Overlay "9" at 1.302,32.526 h1.27 r270; Top Overlay "1" at 1.302,46.242 h1.27 r270; Top Overlay "2" at 3.842,46.75 h1.27 r270